# EAGLE board valhalla_v0.1 (EAGLE 6.5.0)
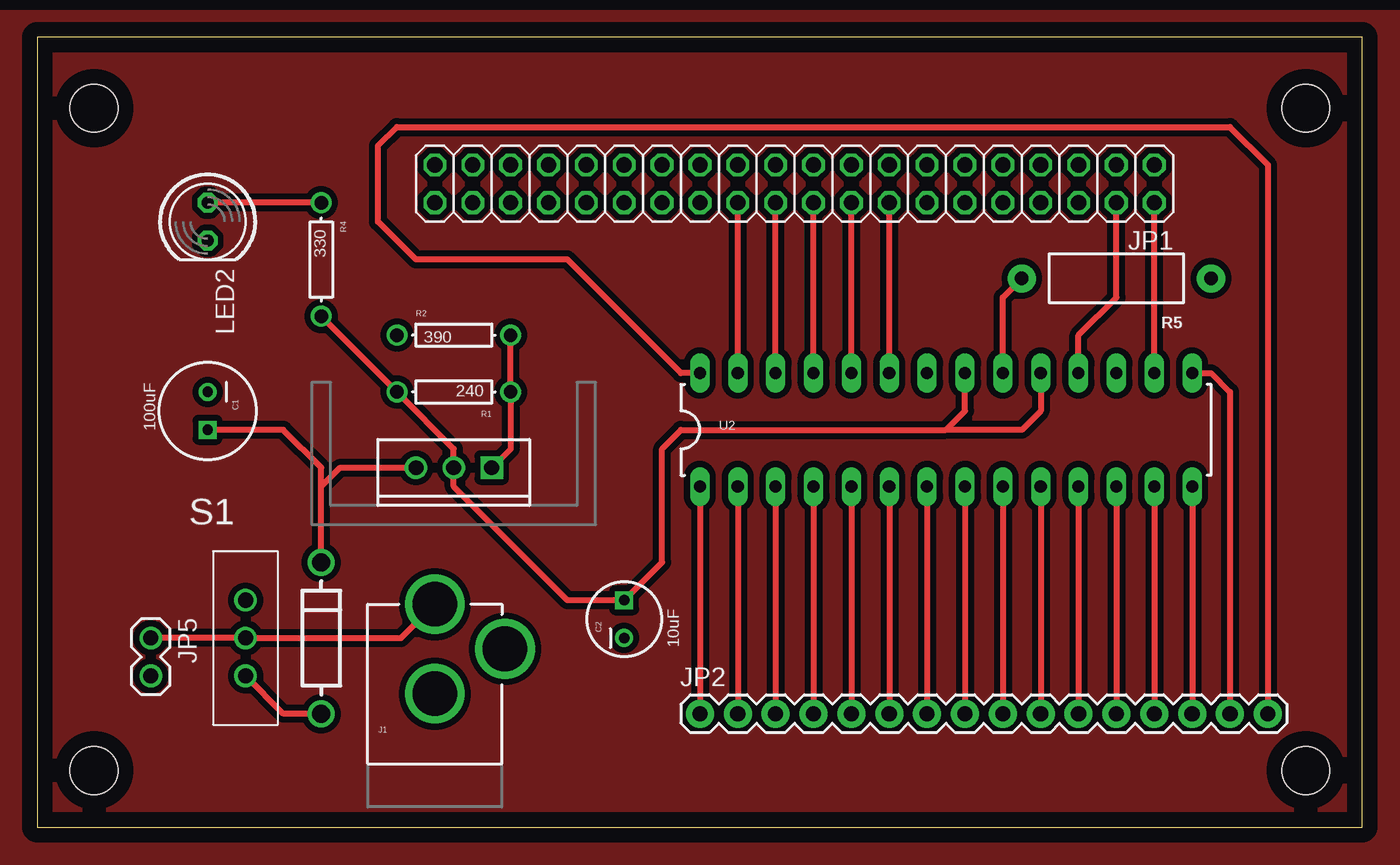
[diagram p0: board, top side]
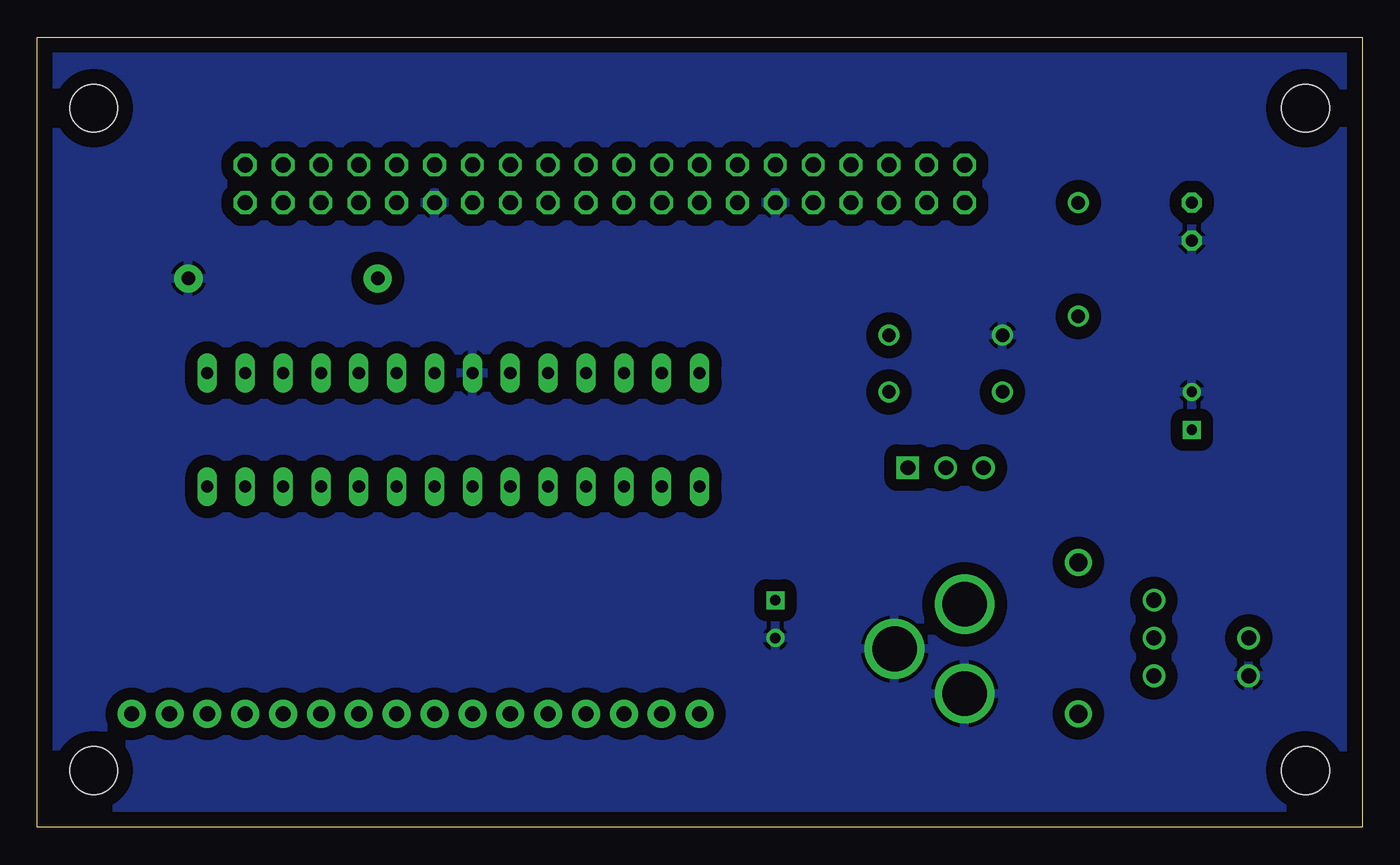
[diagram p1: board, bottom side, seen from below]

Size 88.88 x 53.01 mm. Coordinates in mm from the lower left corner, seen from the top.
Outline: 0,0 88.88,0 88.88,53.01 0,53.01 0,0
Copper layers (1*16): Top 0.035mm / dielectric 1.5mm / Bottom 0.035mm
Design rules "default": minimum track width 10mil, minimum drill 24mil, track to track 8mil, track to pad 8mil, pad to pad 8mil, via to via 8mil, smd to smd 8mil, copper to edge 40mil, drill to drill 8mil, minimum pad ring 10mil, minimum via ring 8mil, stop-mask expansion 4mil, vias tented up to drill 0mil, thermal gap 10mil
Net classes: 0 default: width 0.254 mm
Holes 3.2 mm at 3.81,48.26 85.09,48.26 85.09,3.81 3.81,3.81

## Footprints (pad centres in the part's own frame; a part is rotated, then mirrored left to right if it is on the bottom)
CPOL-RADIAL-100UF-25V = drill 0.7 square: 1 1.27,0 | drill 0.7: 2 -1.27,0
CPOL-RADIAL-10UF-25V = drill 0.7 square: 1 1.27,0 | drill 0.7: 2 -1.27,0
DIODE-0.4 = drill 1.2: A 0,0; C 10.16,0
POWER_JACK_PTH = drill 2.997: GND 0,7.7; GNDBREAK 4.7,10.7; PWR 0,13.7
2X20 = drill 1.016 octagon: 1 -24.13,-1.27; 2 -24.13,1.27; 3 -21.59,-1.27; 4 -21.59,1.27; 5 -19.05,-1.27; 6 -19.05,1.27; 7 -16.51,-1.27; 8 -16.51,1.27; 9 -13.97,-1.27; 10 -13.97,1.27; 11 -11.43,-1.27; 12 -11.43,1.27; 13 -8.89,-1.27; 14 -8.89,1.27; 15 -6.35,-1.27; 16 -6.35,1.27; 17 -3.81,-1.27; 18 -3.81,1.27; 19 -1.27,-1.27; 20 -1.27,1.27; 21 1.27,-1.27; 22 1.27,1.27; 23 3.81,-1.27; 24 3.81,1.27; 25 6.35,-1.27; 26 6.35,1.27; 27 8.89,-1.27; 28 8.89,1.27; 29 11.43,-1.27; 30 11.43,1.27; 31 13.97,-1.27; 32 13.97,1.27; 33 16.51,-1.27; 34 16.51,1.27; 35 19.05,-1.27; 36 19.05,1.27; 37 21.59,-1.27; 38 21.59,1.27; 39 24.13,-1.27; 40 24.13,1.27
1X16 = drill 1.016 pad 1.88: 1 0,0; 2 2.54,0; 3 5.08,0; 4 7.62,0; 5 10.16,0; 6 12.7,0; 7 15.24,0; 8 17.78,0; 9 20.32,0; 10 22.86,0; 11 25.4,0; 12 27.94,0; 13 30.48,0; 14 33.02,0; 15 35.56,0; 16 38.1,0
1X02 = drill 1.016: 1 0,0; 2 2.54,0
LED5MM = drill 0.813 octagon: A -1.27,0; K 1.27,0
AXIAL-0.3 = drill 0.9: P$1 -3.81,0; P$2 3.81,0
AXIAL-0.5 = drill 0.9 pad 1.88: P$1 -6.35,0; P$2 6.35,0
SWITCH-SPST = drill 1.016: 1 0,2.54; 2 0,0; 3 0,-2.54
TO220-ADJ = drill 1 square: ADJ -2.54,0 | drill 1: IN 2.54,0; OUT 0,0
DIL28-3 = drill 0.813 long: 1 -16.51,-3.81; 2 -13.97,-3.81; 3 -11.43,-3.81; 4 -8.89,-3.81; 5 -6.35,-3.81; 6 -3.81,-3.81; 7 -1.27,-3.81; 8 1.27,-3.81; 9 3.81,-3.81; 10 6.35,-3.81; 11 8.89,-3.81; 12 11.43,-3.81; 13 13.97,-3.81; 14 16.51,-3.81; 15 16.51,3.81; 16 13.97,3.81; 17 11.43,3.81; 18 8.89,3.81; 19 6.35,3.81; 20 3.81,3.81; 21 1.27,3.81; 22 -1.27,3.81; 23 -3.81,3.81; 24 -6.35,3.81; 25 -8.89,3.81; 26 -11.43,3.81; 27 -13.97,3.81; 28 -16.51,3.81

## Placement (x,y rotation side)
C1  100uF  [CPOL-RADIAL-100UF-25V]  11.43,27.94 270 top
C2  10uF  [CPOL-RADIAL-10UF-25V]  39.37,13.97 90 top
D1  1N4001  [DIODE-0.4]  19.05,7.62 90 top
J1  POWER_JACKPTH  [POWER_JACK_PTH]  26.67,1.27 0 top
JP1  [2X20]  50.8,43.18 180 top
JP2  M16PTH  [1X16]  44.45,7.62 0 top
JP5  [1X02]  7.62,12.7 270 top
LED2  Power  [LED5MM]  11.43,40.64 270 top
R1  240  [AXIAL-0.3]  27.94,29.21 180 top
R2  390  [AXIAL-0.3]  27.94,33.02 0 top
R4  330  [AXIAL-0.3]  19.05,38.1 270 top
R5  [AXIAL-0.5]  72.39,36.83 180 top
S1  On/Off  [SWITCH-SPST]  13.97,12.7 0 top
U1  LM317  [TO220-ADJ]  27.94,24.13 180 top
U2  TLC5940-NT  [DIL28-3]  60.96,26.67 0 top

## Library data of the parts
C1 C2 D1 J1 JP5 R1 R2 R4 S1 U1 = SparkFun
JP1 = adafruit
JP2 = SparkFun-Connectors
LED2 = SparkFun-Nate
R5 = SparkFun-Resistors
U2 = SparkFun-DigitalIC

## Nets
BLANK: JP1.16 U2.23
GND: C1.2 C2.2 J1.GND J1.GNDBREAK JP1.12 JP1.30 JP5.2 LED2.K R2.P$1 R5.P$1 U2.22
GSCLK: JP1.4 U2.18
IREF: R5.P$2 U2.20
N$1: JP2.1 U2.1
N$2: D1.A S1.3
N$3: J1.PWR JP5.1 S1.2
N$4: JP2.2 U2.2
N$5: R1.P$1 R2.P$2 U1.ADJ
N$6: JP2.3 U2.3
N$7: JP2.4 U2.4
N$8: LED2.A R4.P$1
N$9: JP2.5 U2.5
N$10: JP2.6 U2.6
N$11: JP2.7 U2.7
N$12: JP2.8 U2.8
N$13: JP2.9 U2.9
N$14: JP2.10 U2.10
N$15: JP2.11 U2.11
N$16: JP2.12 U2.12
N$17: JP2.13 U2.13
N$18: JP2.14 U2.14
N$19: JP2.15 U2.15
N$20: JP2.16 U2.28
RAW: C1.1 D1.C U1.IN
SCLK: JP1.20 U2.25
SIN: JP1.22 U2.26
VCC: C2.1 R1.P$2 R4.P$2 U1.OUT U2.19 U2.21
VPRG: JP1.24 U2.27
XERR: JP1.2 U2.16
XLAT: JP1.18 U2.24

## Tracks (layer width: path | path; a pad name or v marks a point on that pad's centre or on a via)
BLANK
  Top 0.406: U2.23 JP1.16
GND
  pour Bottom (isolate 0.813): 0,105.41 0,-2.54 167.64,-2.54 167.64,106.68 0,106.68
GSCLK
  Top 0.406: U2.18 69.85,33.02 72.39,35.56 JP1.4
IREF
  Top 0.406: U2.20 64.77,35.56 R5.P$2
N$1
  Top 0.406: U2.1 JP2.1
N$2
  Top 0.406: D1.A 16.51,7.62 S1.3
N$3
  Top 0.406: J1.PWR 24.4,12.7 S1.2 JP5.1
N$4
  Top 0.406: U2.2 JP2.2
N$5
  Top 0.406: U1.ADJ 31.75,25.4 R1.P$1 R2.P$2
N$6
  Top 0.406: U2.3 JP2.3
N$7
  Top 0.406: U2.4 JP2.4
N$8
  Top 0.406: R4.P$1 LED2.A
N$9
  Top 0.406: U2.5 JP2.5
N$10
  Top 0.406: U2.6 JP2.6
N$11
  Top 0.406: U2.7 JP2.7
N$12
  Top 0.406: U2.8 JP2.8
N$13
  Top 0.406: U2.9 JP2.9
N$14
  Top 0.406: U2.10 JP2.10
N$15
  Top 0.406: U2.11 JP2.11
N$16
  Top 0.406: U2.12 JP2.12
N$17
  Top 0.406: U2.13 JP2.13
N$18
  Top 0.406: U2.14 JP2.14
N$19
  Top 0.406: U2.15 78.74,30.48 80.01,29.21 JP2.15
N$20
  Top 0.406: U2.28 43.18,30.48 35.56,38.1 25.4,38.1 22.86,40.64 22.86,45.72 24.13,46.99 80.01,46.99 82.55,44.45 JP2.16
N$21
  pour Top (isolate 0.406): -2.54,54.61 -2.54,-2.54 91.44,-2.54 91.44,54.61
RAW
  Top 0.406: D1.C 19.05,22.86 | 19.05,22.86 20.32,24.13 U1.IN | 19.05,22.86 19.05,24.13 16.51,26.67 C1.1
SCLK
  Top 0.406: U2.25 JP1.20
SIN
  Top 0.406: U2.26 JP1.22
VCC
  Top 0.406: R4.P$2 R1.P$2 27.94,25.4 U1.OUT 27.94,22.86 35.56,15.24 C2.1 41.91,17.78 41.91,25.4 43.18,26.67 60.96,26.67 | 60.96,26.67 62.23,27.94 U2.21 | U2.19 67.31,27.94 66.04,26.67 60.96,26.67
VPRG
  Top 0.406: U2.27 JP1.24
XERR
  Top 0.406: U2.16 JP1.2
XLAT
  Top 0.406: U2.24 JP1.18